# EAGLE board routed-norf (EAGLE 7.7.0)
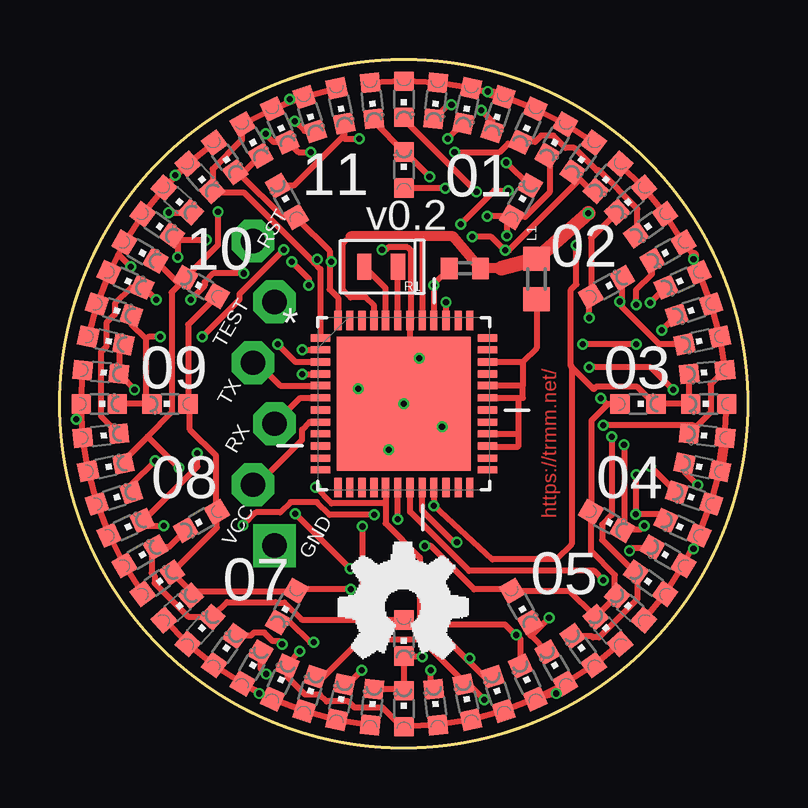
[diagram p0: board, top side]
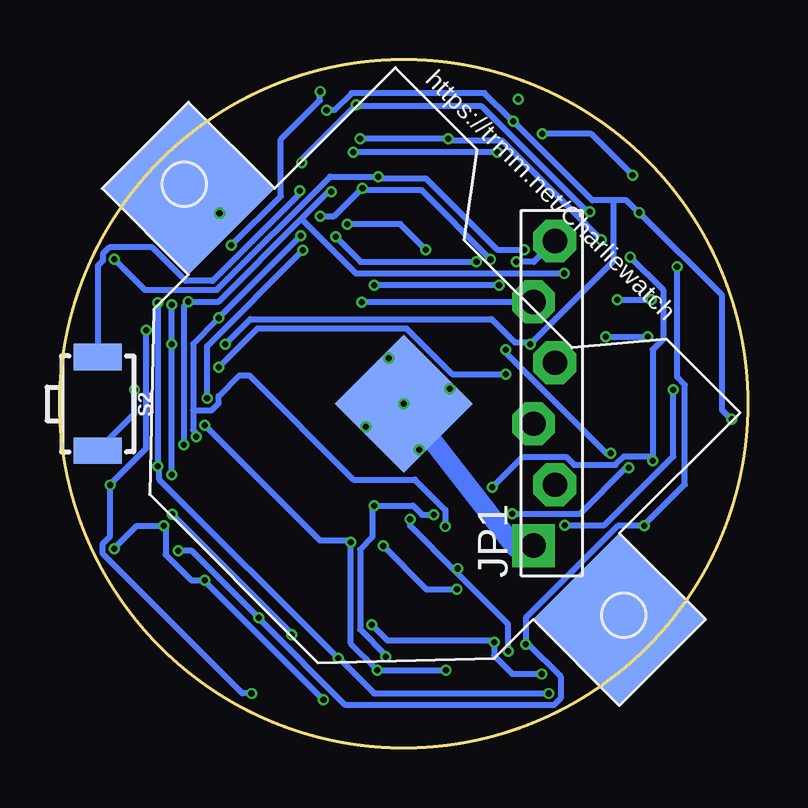
[diagram p1: board, bottom side, seen from below]

Size 28.66 x 28.66 mm. Coordinates in mm from the lower left corner, seen from the top.
Outline: circle at 14.33,14.33 radius 14.33
Copper layers (1*16): Top 0.035mm / dielectric 1.5mm / Bottom 0.035mm
Design rules "default *": minimum track width 10mil, minimum drill 10mil, track to track 5mil, track to pad 5mil, pad to pad 5mil, via to via 5mil, smd to smd 5mil, copper to edge 40mil, drill to drill 8mil, minimum pad ring 10mil, minimum via ring 4mil, stop-mask expansion 4mil, vias tented up to drill 15mil, thermal gap 10mil
Net classes: 0 default: width 0.102 mm, drill 0.025 mm, clearance 0.025 mm

## Footprints (pad centres in the part's own frame; a part is rotated, then mirrored left to right if it is on the bottom)
1X06-BIGLOCK = drill 1.016 pad 1.778 square: 1 -6.35,0.762 | drill 1.016 pad 1.778 octagon: 2 -3.81,-0.127; 3 -1.27,0.762; 4 1.27,-0.127; 5 3.81,0.762; 6 6.35,-0.127
R0603 = smd 1 x 1.1: 1 -0.85,0; 2 0.85,0
CHIPLED_0603 = smd 0.8 x 0.8: A 0,-0.75; C 0,0.75
R0402 = smd 0.7 x 0.9: 1 -0.65,0; 2 0.65,0
TACTILE_SWITCH_SMD_RIGHT_ANGLE = smd 1.1 x 2: 1 -1.95,0; 2 1.95,0
TP10SQ = smd 1 x 1: TP 0,0
TP10R = smd 1 x 1: TP 0,0
QFN50P700X700X100-49N = smd 0.813 x 0.305: 1 -3.48,2.743; 2 -3.48,2.261; 3 -3.48,1.753; 4 -3.48,1.245; 5 -3.48,0.762; 6 -3.48,0.254; 7 -3.48,-0.254; 8 -3.48,-0.762; 9 -3.48,-1.245; 10 -3.48,-1.753; 11 -3.48,-2.261; 12 -3.48,-2.743; 25 3.48,-2.743; 26 3.48,-2.261; 27 3.48,-1.753; 28 3.48,-1.245; 29 3.48,-0.762; 30 3.48,-0.254; 31 3.48,0.254; 32 3.48,0.762; 33 3.48,1.245; 34 3.48,1.753; 35 3.48,2.261; 36 3.48,2.743 | smd 0.305 x 0.813: 13 -2.743,-3.48; 14 -2.261,-3.48; 15 -1.753,-3.48; 16 -1.245,-3.48; 17 -0.762,-3.48; 18 -0.254,-3.48; 19 0.254,-3.48; 20 0.762,-3.48; 21 1.245,-3.48; 22 1.753,-3.48; 23 2.261,-3.48; 24 2.743,-3.48; 37 2.743,3.48; 38 2.261,3.48; 39 1.753,3.48; 40 1.245,3.48; 41 0.762,3.48; 42 0.254,3.48; 43 -0.254,3.48; 44 -0.762,3.48; 45 -1.245,3.48; 46 -1.753,3.48; 47 -2.261,3.48; 48 -2.743,3.48 | smd 5.588 x 5.588: 49 0,0
CR2032-SMD = smd 5.08 x 5.08: +$1 -12.7,0; +$2 12.7,0 | smd 4.064 x 4.064: - 0,0
2.0X1.2-2PAD = smd 0.6 x 1.1: 1 -0.7,0; 2 0.7,0

## Placement (x,y rotation side)
JP1  [1X06-BIGLOCK]  8.17,14.78 90 bottom
L1  [R0603]  19.86,19.54 90 top
LED0  [CHIPLED_0603]  13,26.96 186 top
LED1  [CHIPLED_0603]  14.33,27.03 180 top
LED2  [CHIPLED_0603]  15.66,26.96 174 top
LED3  [CHIPLED_0603]  16.97,26.75 168 top
LED4  [CHIPLED_0603]  18.25,26.41 162 top
LED5  [CHIPLED_0603]  19.5,25.93 156 top
LED6  [CHIPLED_0603]  20.68,25.33 150 top
LED7  [CHIPLED_0603]  21.8,24.6 144 top
LED8  [CHIPLED_0603]  26.96,15.66 96 top
LED9  [CHIPLED_0603]  26.75,16.97 102 top
LED10  [CHIPLED_0603]  26.41,18.25 108 top
LED11  [CHIPLED_0603]  25.93,19.5 114 top
LED12  [CHIPLED_0603]  25.33,20.68 120 top
LED13  [CHIPLED_0603]  24.6,21.8 126 top
LED14  [CHIPLED_0603]  23.77,22.83 132 top
LED15  [CHIPLED_0603]  22.83,23.77 138 top
LED16  [CHIPLED_0603]  27.03,14.33 90 top
LED17  [CHIPLED_0603]  26.96,13 84 top
LED18  [CHIPLED_0603]  26.75,11.69 78 top
LED19  [CHIPLED_0603]  26.41,10.41 72 top
LED20  [CHIPLED_0603]  25.93,9.16 66 top
LED21  [CHIPLED_0603]  25.33,7.98 60 top
LED22  [CHIPLED_0603]  24.6,6.87 54 top
LED23  [CHIPLED_0603]  23.77,5.83 48 top
LED24  [CHIPLED_0603]  14.33,1.63 0 top
LED25  [CHIPLED_0603]  15.66,1.7 6 top
LED26  [CHIPLED_0603]  16.97,1.91 12 top
LED27  [CHIPLED_0603]  18.25,2.25 18 top
LED28  [CHIPLED_0603]  19.5,2.73 24 top
LED29  [CHIPLED_0603]  20.68,3.33 30 top
LED30  [CHIPLED_0603]  21.8,4.06 36 top
LED31  [CHIPLED_0603]  22.83,4.89 42 top
LED32  [CHIPLED_0603]  13,1.7 354 top
LED33  [CHIPLED_0603]  11.69,1.91 348 top
LED34  [CHIPLED_0603]  10.41,2.25 342 top
LED35  [CHIPLED_0603]  9.16,2.73 336 top
LED36  [CHIPLED_0603]  7.98,3.33 330 top
LED37  [CHIPLED_0603]  6.87,4.06 324 top
LED38  [CHIPLED_0603]  5.83,4.89 318 top
LED39  [CHIPLED_0603]  4.89,5.83 312 top
LED40  [CHIPLED_0603]  1.7,15.66 264 top
LED41  [CHIPLED_0603]  1.63,14.33 270 top
LED42  [CHIPLED_0603]  1.7,13 276 top
LED43  [CHIPLED_0603]  1.91,11.69 282 top
LED44  [CHIPLED_0603]  2.25,10.41 288 top
LED45  [CHIPLED_0603]  2.73,9.16 294 top
LED46  [CHIPLED_0603]  3.33,7.98 300 top
LED47  [CHIPLED_0603]  4.06,6.87 306 top
LED48  [CHIPLED_0603]  1.91,16.97 258 top
LED49  [CHIPLED_0603]  2.25,18.25 252 top
LED50  [CHIPLED_0603]  2.73,19.5 246 top
LED51  [CHIPLED_0603]  3.33,20.68 240 top
LED52  [CHIPLED_0603]  4.06,21.8 234 top
LED53  [CHIPLED_0603]  4.89,22.83 228 top
LED54  [CHIPLED_0603]  5.83,23.77 222 top
LED55  [CHIPLED_0603]  6.87,24.6 216 top
LED56  [CHIPLED_0603]  14.33,4.58 180 top
LED57  [CHIPLED_0603]  14.33,24.08 0 top
LED58  [CHIPLED_0603]  22.77,19.2 300 top
LED59  [CHIPLED_0603]  19.2,22.77 330 top
LED60  [CHIPLED_0603]  11.69,26.75 192 top
LED61  [CHIPLED_0603]  10.41,26.41 198 top
LED62  [CHIPLED_0603]  9.16,25.93 204 top
LED63  [CHIPLED_0603]  7.98,25.33 210 top
LED64  [CHIPLED_0603]  24.08,14.33 270 top
LED65  [CHIPLED_0603]  4.58,14.33 90 top
LED66  [CHIPLED_0603]  22.77,9.46 240 top
LED67  [CHIPLED_0603]  5.89,19.2 60 top
LED68  [CHIPLED_0603]  9.46,22.77 30 top
LED69  [CHIPLED_0603]  9.46,5.89 150 top
LED70  [CHIPLED_0603]  19.2,5.89 210 top
LED71  [CHIPLED_0603]  5.89,9.46 120 top
R1  75k  [R0402]  16.87,19.98 0 top
S2  MOMENTARY-SWITCH-SPST-SMD-RIGHT-ANGLE  [TACTILE_SWITCH_SMD_RIGHT_ANGLE]  27.09,14.33 270 bottom
TP1  PTR1TP10SQ  [TP10SQ]  8.87,8.43 0 top
TP2  PTR1TP10R  [TP10R]  8.23,10.97 0 top
TP3  PTR1TP10R  [TP10R]  8.87,13.51 0 top
TP4  PTR1TP10R  [TP10R]  8.23,16.05 0 top
TP5  PTR1TP10R  [TP10R]  8.87,18.59 0 top
TP6  PTR1TP10R  [TP10R]  8.23,21.13 0 top
U2  CC430F5137IRGZR  [QFN50P700X700X100-49N]  14.33,14.33 0 top
U$1  [CR2032-SMD]  14.33,14.33 315 bottom
X1  CRYSTALS-NOGND-IQXC-25  [2.0X1.2-2PAD]  13.38,20.05 180 top

## Library data of the parts
JP1 U$1 = adafruit
L1 R1 = rcl
LED0 LED1-LED71 = led
S2 = SparkFun-Switches; PROD_ID: COMP-12265
TP1-TP6 = testpad
U2 = Texas Instruments_By_element14_Batch_1; MPN: CC430F5137IRGZR; OC_FARNELL: -; OC_NEWARK: 68R5912; PACKAGE: QFN-48; SUPPLIER: TEXAS INSTRUMENTS
X1 = IQD-Frequency-Products

## Nets
AVCC: L1.1 U2.27 U2.28 U2.31 U2.32 U2.34
B0: LED0.A LED1.A LED2.A LED3.A LED4.A LED5.A LED6.A LED7.A LED8.C LED16.C LED24.C LED32.C LED40.C LED48.C LED56.C LED64.C U2.21
B1: LED0.C LED8.A LED9.A LED10.A LED11.A LED12.A LED13.A LED14.A LED15.A LED17.C LED25.C LED33.C LED41.C LED49.C LED57.C LED65.C U2.20
B2: LED1.C LED9.C LED16.A LED17.A LED18.A LED19.A LED20.A LED21.A LED22.A LED23.A LED26.C LED34.C LED42.C LED50.C LED58.C LED66.C U2.19
B3: LED2.C LED10.C LED18.C LED24.A LED25.A LED26.A LED27.A LED28.A LED29.A LED30.A LED31.A LED35.C LED43.C LED51.C LED59.C LED67.C U2.18
B4: LED3.C LED11.C LED19.C LED27.C LED32.A LED33.A LED34.A LED35.A LED36.A LED37.A LED38.A LED39.A LED44.C LED52.C LED60.C LED68.C U2.17
B5: LED4.C LED12.C LED20.C LED28.C LED36.C LED40.A LED41.A LED42.A LED43.A LED44.A LED45.A LED46.A LED47.A LED53.C LED61.C LED69.C U2.3
B6: LED5.C LED13.C LED21.C LED29.C LED37.C LED45.C LED48.A LED49.A LED50.A LED51.A LED52.A LED53.A LED54.A LED55.A LED62.C LED70.C U2.2
B7: LED6.C LED14.C LED22.C LED30.C LED38.C LED46.C LED54.C LED56.A LED57.A LED58.A LED59.A LED60.A LED61.A LED62.A LED63.A LED71.C U2.1
B8: LED7.C LED15.C LED23.C LED31.C LED39.C LED47.C LED55.C LED63.C LED64.A LED65.A LED66.A LED67.A LED68.A LED69.A LED70.A LED71.A U2.48
BSL_RST: JP1.6 R1.1 TP6.TP U2.40
BSL_RX: JP1.3 TP3.TP U2.6
BSL_TEST: JP1.5 TP5.TP U2.39
BSL_TX: JP1.4 TP4.TP U2.5
BSL_VCC: JP1.2 TP2.TP U2.8
BUTTON: S2.2 U2.4
DVCC_3: U2.22
GND: JP1.1 S2.1 TP1.TP U2.42 U2.49 U$1.-
P2.4: U2.47
P2.7: U2.23
P3.5: U2.16
P3.6: U2.15
P3.7: U2.14
R_BIAS: U2.33
RF_N: U2.30
RF_P: U2.29
RF_XIN: U2.25
RF_XOUT: U2.26
VCC: L1.2 R1.2 U2.41 U2.45 U$1.+$1
VCORE: U2.7
XIN: U2.44 X1.2
XOUT: U2.43 X1.1

## Tracks (layer width: path | path; a pad name or v marks a point on that pad's centre or on a via)
AVCC
  Top 0.254: U2.27 17.84,12.55 19.09,12.55 19.09,13.09 | U2.28 19.09,13.09 | U2.34 19.28,16.08 | 19.28,16.08 19.28,15.09 | 19.28,15.09 U2.32 | 19.28,15.09 19.28,14.58 U2.31 19.09,14.58 19.09,13.09 | L1.1 19.85,16.65 19.28,16.08
B0  (via drill 0.25)
  Top 0.254: LED7.A LED6.A LED5.A LED4.A LED3.A LED2.A LED1.A LED0.A | LED32.C 14.23,2.44 LED24.C LED56.C 14.43,3.79 v15.09,3.79 | LED48.C 2.62,16.79 2.47,16.64 2.47,15.6 LED40.C 2.54,15.5 3.1,14.94 v3.1,14.91 | LED8.C 26.22,14.43 LED16.C LED64.C 24.72,14.38 24.06,15.04 22.33,15.04 22.24,14.95 21.29,15.91 | v7.62,9.28 8.16,9.81 9.17,9.81 9.61,10.24 10.7,10.24 11.23,9.71 v13.09,9.71 | v21.52,20.93 21.52,19.31 21.29,19.08 21.29,15.91 | U2.21 v15.58,10.09 15.59,10.09 18.01,7.85 20.68,7.85 21.32,8.49 21.32,15.91 21.29,15.91
  Top 0.406: v17.82,27.35 LED4.A
  Bottom 0.254: v3.1,14.91 3.1,12.15 5.97,9.28 v7.62,9.28 | v13.09,9.71 13.57,9.71 13.95,10.09 v15.58,10.09 15.65,9.99 15.65,8.77 16.16,8.26 16.16,4.93 15.09,3.87 v15.09,3.79 | v21.52,20.93 19.46,22.99 19.46,25.35 17.84,26.98 17.84,27.34 v17.82,27.35
B1  (via drill 0.25)
  Top 0.254: LED15.A LED14.A LED13.A LED12.A 26.42,20.54 LED11.A LED10.A LED9.A LED8.A 27.61,15.65 27.11,15.14 27.11,13.97 LED17.C 26.4,13.44 v22.64,13.44 | v12.58,3.23 11.99,2.65 11.87,2.65 LED33.C | v15.45,3.23 15.45,2.6 15.58,2.47 LED25.C | U2.20 15.09,9.89 16.41,8.56 v16.54,8.56 | LED41.C LED65.C 3.59,14.43 3.59,17.05 | 3.59,17.05 2.98,17.66 LED49.C | LED0.C 13.09,26.19 13.09,26.09 14.33,24.85 LED57.C 14.43,24.77 v15.4,23.8 | v4.17,17.12 3.69,17.12 3.59,17.05 | v5.92,17.12 7.47,18.67 7.47,18.9 v9.33,20.76
  Top 0.406: v26.4,20.36 26.42,20.54
  Bottom 0.254: v12.58,3.23 v15.45,3.23 15.52,3.33 16.54,4.35 v16.54,8.56 16.64,8.64 17.84,8.64 v22.64,13.44 | v26.4,20.36 v26.4,20.35 25.13,19.08 22.13,19.08 17.4,23.8 v15.4,23.8 15.3,23.73 13.42,23.73 10.44,20.76 v9.33,20.76 | v5.92,17.12 v4.17,17.12
B2  (via drill 0.25)
  Top 0.254: LED23.A LED22.A LED21.A LED20.A | LED20.A LED19.A LED18.A | LED17.A LED16.A | v26.4,8.3 LED20.A | LED34.C 11,2.98 12.53,4.5 15.07,4.5 16.79,2.77 16.79,2.65 LED26.C 16.92,2.57 17.12,2.57 v17.68,2.01 | v24.34,9.25 24.19,9.1 23.42,9.1 LED66.C 23.5,9.2 v23.5,12.63 | U2.19 14.58,9.83 17.05,7.37 22.26,7.37 v22.64,6.99 | LED42.C 1.71,13.82 1.71,16.49 1.94,16.72 1.94,17.71 2.29,18.06 2.29,18.52 2.95,19.18 LED50.C 3.54,19.16 v4.02,18.67 | 23.42,18.6 23.42,18.37 24.97,16.82 LED9.C | 23.42,18.6 23.42,19.56 LED58.C | LED1.C 14.33,26.19 v17.35,23.17 | v23.32,18.6 23.42,18.6 | v5.44,18.67 6.02,19.26 6.02,19.41 6.38,19.77 v7.65,19.77
  Top 0.406: LED17.A LED18.A
  Bottom 0.254: v26.4,8.3 v26.4,8.31 25.46,9.25 v24.34,9.25 24.26,9.15 24.26,8.06 23.2,6.99 v22.64,6.99 22.56,6.89 v17.68,2.01 | v17.35,23.17 17.48,23.17 18.61,22.04 | 18.61,22.04 22.05,18.6 v23.32,18.6 23.4,18.5 23.5,18.39 v23.5,12.63 | v5.44,18.67 v4.02,18.67 | v7.65,19.77 16.34,19.77 18.61,22.04
B3  (via drill 0.25)
  Top 0.254: LED28.A LED27.A LED26.A LED25.A LED24.A 14.2,0.92 13.44,1.68 12.27,1.68 12.02,1.94 11.1,1.94 10.83,2.21 10.22,2.21 9.48,2.95 LED35.C 9.5,3.54 v9.99,4.02 | LED31.A LED30.A LED29.A LED28.A | v20.68,2.27 LED28.A | v18.6,24.39 19.56,23.42 LED59.C | v16.31,26.8 16.18,26.8 15.6,26.22 LED2.C | 3.65,12.97 4.65,13.97 4.65,18.98 5.24,19.56 LED67.C | 3.65,12.97 2.65,11.97 2.65,11.87 LED43.C | LED51.C 3.99,20.3 4.91,19.39 LED67.C | v6.58,22.33 6.58,20.96 5.31,19.69 LED67.C | v26.57,10.95 26.04,11.49 26.04,11.84 LED18.C | v25.07,17.4 LED10.C | v14.08,9.53 U2.18 | v4.96,11.66 3.65,12.97 | v12.1,7.47 v9.81,9.76
  Bottom 0.254: v18.6,24.39 18.6,24.52 v16.31,26.8 16.21,26.73 11.08,26.73 6.69,22.33 v6.58,22.33 | v20.68,2.27 21.06,2.27 26.88,8.08 26.88,8.51 26.57,8.82 v26.57,10.95 26.5,11.05 25.07,12.48 v25.07,17.4 | v14.08,9.53 14.08,9.25 12.21,7.38 | 12.21,7.38 9.99,5.16 v9.99,4.02 | v4.96,11.66 5.08,11.66 6.99,9.76 v9.81,9.76 | v12.1,7.47 12.12,7.47 12.21,7.38
B4  (via drill 0.25)
  Top 0.254: LED36.A LED37.A LED38.A LED39.A | LED36.A LED35.A LED34.A LED33.A LED32.A | LED36.A v8.3,2.27 | 11.78,25.47 11.84,25.53 LED60.C | 11.78,25.47 9.73,23.42 9.1,23.42 LED68.C | v16.16,25.38 16.79,26.01 LED3.C | v12.48,25.38 11.87,25.38 11.78,25.47 | v3.97,11.97 2.98,10.98 LED44.C | v4.91,20.45 4.91,21.11 4.68,21.34 LED52.C 5.01,21.16 v6.1,21.16 | v24.59,11.74 LED19.C | v24.59,18.55 25.23,19.18 LED11.C | 16.98,3.65 15.98,4.65 15.47,4.65 14.99,5.14 14.99,7.93 13.57,9.35 13.57,10.19 | 16.98,3.65 17.66,2.98 LED27.C | U2.17 13.57,10.19 | v17.07,3.74 16.98,3.65 | v10.65,10.85 11.31,10.19 13.57,10.19
  Bottom 0.254: v16.16,25.38 v12.48,25.38 12.37,25.3 10.24,25.3 v6.1,21.16 | v4.91,20.45 3.54,19.08 3.54,17.02 3.97,16.59 v3.97,11.97 4.07,12.15 5.16,12.15 5.52,11.79 7.24,11.79 7.57,12.12 9.38,12.12 v10.65,10.85 | v24.59,18.55 v24.59,11.74 24.52,11.64 24.52,11.18 v17.07,3.74 16.97,3.66 15.58,2.27 v8.3,2.27
B5  (via drill 0.25)
  Top 0.254: LED41.A LED42.A LED43.A LED44.A LED45.A LED46.A LED47.A | LED41.A LED40.A | LED41.A v0.68,13.7 | v4.53,22.31 5.44,22.31 LED53.C | v9.78,26.12 10.19,25.71 10.62,25.71 LED61.C | v17.56,26.57 18.01,26.12 18.01,25.71 LED4.C | U2.3 9.81,16.08 v9.07,16.82 | v8.59,3.08 8.36,3.31 8.36,3.97 LED36.C | v10.57,4.4 10.42,4.4 9.58,5.24 9.1,5.24 LED69.C | LED28.C 19.18,3.43 19.18,4.53 v19,4.7 18.9,4.78 18.55,5.14 v15.68,5.14 | LED20.C 25.23,9.48 24.97,9.73 v23.98,9.73 24.01,9.83 v24.01,11.38 | v24.01,18.47 24.01,19.08 24.67,19.74 24.67,20.3 LED12.C | v24.01,16.82 v21.77,16.82
  Bottom 0.254: v0.68,13.7 v0.69,13.7 1.07,14.08 1.07,18.85 v4.53,22.31 4.63,22.38 5.06,22.81 5.62,22.81 | 5.62,22.81 6.48,22.81 v9.78,26.12 9.89,26.19 10.98,27.28 16.51,27.28 17.23,26.57 v17.56,26.57 | 5.62,22.81 5.62,20.27 v9.07,16.82 9.17,16.9 9.71,16.9 10.67,17.86 20.73,17.86 v21.77,16.82 | v8.59,3.08 9.81,3.08 10.57,3.84 v10.57,4.4 10.67,4.48 15.02,4.48 v15.68,5.14 | v19,4.7 19,4.75 v23.98,9.73 | v24.01,11.38 v24.01,16.82 v24.01,18.47
B6  (via drill 0.25)
  Top 0.254: LED55.A LED54.A | LED54.A LED53.A LED52.A LED51.A 2.41,20.53 | 2.41,20.53 LED50.A LED49.A LED48.A | LED54.A v4.81,23.86 | 19.63,4.67 20.3,3.99 LED29.C | 19.63,4.67 19.59,4.7 LED70.C | v23.73,8.21 23.86,8.34 24.67,8.34 LED21.C | 19.63,4.67 v20.38,5.42 | LED13.C 24.01,21.37 24.06,21.42 24.06,22.46 22.46,24.06 22.36,24.06 21.42,25 21.06,25 20.55,25.51 20.05,25.51 19.79,25.25 19.21,25.25 LED5.C 19.08,25.18 18.67,25.18 18.32,24.82 v16.44,24.82 | v8.56,25.58 8.89,25.25 9.45,25.25 LED62.C 9.58,25.18 9.94,24.82 v10.44,24.82 | v9.25,4.32 9.12,4.45 8.87,4.45 8.51,4.81 8.08,4.81 7.96,4.68 7.32,4.68 LED37.C | v4.32,9.25 3.64,9.25 3.43,9.45 LED45.C 3.54,9.53 5.72,11.71 v5.72,12.27 | v10.09,16.59 U2.2 | v2.95,20.05 2.52,20.48 2.41,20.53
  Bottom 0.254: v23.73,8.21 23.17,8.21 v20.38,5.42 20.3,5.31 16.77,1.78 8.08,1.78 7.8,2.06 7.8,2.98 9.15,4.32 v9.25,4.32 9.25,5.42 5.42,9.25 v4.32,9.25 4.25,9.35 2.62,10.98 2.62,15.12 2.95,15.45 v2.95,20.05 | v8.56,25.58 6.53,25.58 v4.81,23.86 | v10.09,16.59 10.09,16.46 5.9,12.27 v5.72,12.27 | v10.44,24.82 v16.44,24.82
B7  (via drill 0.25)
  Top 0.254: LED61.A LED60.A | LED61.A LED62.A LED63.A 7.57,25.86 7.57,25.33 6.35,24.11 6.35,23.22 LED54.C 6.46,23.14 7.65,23.14 10.58,20.21 | LED61.A v9.57,27.03 | LED71.C 4.53,8.36 3.99,8.36 LED46.C 3.89,8.26 3.81,8.18 3.81,7.29 3.94,7.17 3.94,6.86 5.34,5.47 6.33,5.47 LED38.C 6.43,5.54 6.96,6.08 8.97,6.08 9,6.05 9.35,6.05 10.06,5.34 12.6,5.34 | 12.6,5.34 LED56.A | U2.1 10.85,19.94 10.58,20.21 | LED30.C 21.37,4.65 22.15,4.65 22.2,4.6 22.46,4.6 24.06,6.2 24.06,7.24 24.01,7.29 LED22.C 23.88,7.37 22.59,8.67 22.59,9.3 22.99,9.71 v22.99,12.96 | LED14.C 23.2,22.31 22.13,21.24 22.13,18.85 LED58.A 22.05,18.72 v22.05,17.91 | LED59.A 18.85,22.13 19.39,22.13 20.4,23.14 20.4,24.59 20.32,24.67 LED6.C | v16.06,23.32 LED57.A | v17.81,22.15 18.7,22.15 LED59.A | v18.62,21.34 18.62,22.05 LED59.A | v10.72,20.35 10.58,20.21 | v12.6,9.23 12.6,5.34
  Bottom 0.254: v17.81,22.15 17.23,22.15 v16.06,23.32 15.96,23.25 13.62,23.25 v10.72,20.35 | v18.62,21.34 v22.05,17.91 22.13,17.81 23.12,16.82 23.12,14.08 | v22.99,12.96 22.99,13.11 23.12,13.24 23.12,14.08 | v12.6,9.23 12.6,9.91 13.87,11.18 16.44,11.18 20.78,15.52 21.19,15.52 22.05,14.66 22.05,14.36 22.33,14.08 23.12,14.08
B8  (via drill 0.25)
  Top 0.254: LED67.A 5.34,17.63 LED65.A 5.42,14.23 5.42,13.26 6.51,12.17 6.51,9.96 LED71.A 6.53,9.81 6.53,9.17 4.75,7.4 LED47.C 4.68,7.29 5.44,6.53 5.44,6.35 LED39.C 5.54,6.53 9.81,6.53 LED69.A 9.94,6.61 v12.12,6.61 | LED63.C 8.34,24.67 7.68,24.01 LED55.C 7.5,23.91 9.28,22.13 9.81,22.13 LED68.A 9.91,22.03 11.23,20.71 11.23,20.25 | U2.48 11.59,18.75 11.23,19.11 11.23,20.25 | 21.66,23.69 21.37,23.98 LED7.C | 21.66,23.69 22.13,23.22 22.31,23.22 LED15.C | LED64.A 22.84,14.33 22.8,14.29 | 22.8,14.29 22.15,13.64 22.15,9.96 LED66.A 22.13,9.81 22.13,8.18 23.12,7.19 23.12,6.43 LED23.C 23.2,6.33 22.33,5.47 LED31.C 22.23,5.54 21.24,6.53 18.85,6.53 LED70.A 18.72,6.61 17.25,6.61 15.45,8.41 v15.19,8.41 | 21.66,23.69 18.7,20.73 v18.55,20.73 18.45,20.81 17.96,21.29 v17.18,21.29 | 22.8,14.29 v22.53,14.56 | v11.31,20.25 11.23,20.25
  Bottom 0.254: v18.55,20.73 22.53,16.74 v22.53,14.56 | v11.31,20.25 16.13,20.25 v17.18,21.29 | v12.12,6.61 13.39,6.61 v15.19,8.41
BSL_RST  (via drill 0.25)
  Top 0.254: U2.40 v15.58,19.28 15.58,19.33 R1.1 | TP6.TP 8.23,21.14 8.06,21.14 JP1.6 | v10.37,19.28 10.37,19.54 v9.66,20.25
  Bottom 0.254: v10.37,19.28 v15.58,19.28 | v9.66,20.25 8.92,20.25 JP1.6
BSL_RX
  Top 0.254: U2.6 10.01,14.58 JP1.3 8.82,13.52 8.23,13.52 TP3.TP
BSL_TEST  (via drill 0.25)
  Top 0.254: v16.08,18.57 U2.39 | TP5.TP 8.23,18.6 8.92,18.6 JP1.5
  Bottom 0.254: v16.08,18.57 8.95,18.57 JP1.5
BSL_TX
  Top 0.254: U2.5 9.17,15.09 TP4.TP 8.13,16.03 8.06,16.03 JP1.4
BSL_VCC
  Top 0.254: U2.8 10.39,13.57 10.09,13.26 10.09,12.83 8.23,10.98 TP2.TP 8.13,10.98 8.06,10.98 JP1.2
BUTTON  (via drill 0.25)
  Top 0.254: v10.09,15.58 U2.4 | v22.05,15.85 24.62,15.85 v25.56,14.91
  Bottom 0.254: v10.09,15.58 12.32,15.58 14.23,17.48 20.43,17.48 v22.05,15.85 | v25.56,14.91 25.56,13.92 27.08,12.4 S2.2
GND  (via drill 0.25)
  Top 0.254: 14.58,16.3 U$1.- | v12.43,14.97 U$1.- | v13.7,12.43 U$1.- | v14.97,16.24 U$1.- | v15.92,13.38 U$1.- | U$1.- 14.58,16.41 U2.42 14.64,17.91 14.64,20.71 14.48,20.86 13.67,20.86 13.57,20.76 v13.42,20.76 | v18.67,23.22 18.09,23.22 v16.69,21.82
  Top 0.61: U$1.- 12.43,12.43 12.43,12.11
  Bottom 0.254: TP1.TP 8.95,8.41 JP1.1 | v18.67,23.22 18.67,23.09 22.31,19.46 23.42,19.46 24.82,20.86 26.6,20.86 26.88,20.58 26.88,20.3 27.08,20.1 S2.1 | v16.69,21.82 14.48,21.82 v13.42,20.76
  Bottom 0.813: TP1.TP 9.7,8.36 U$1.-
  other vias: 14.33,14.33 8.87,8.43
VCC  (via drill 0.25)
  Top 0.254: U2.45 13.09,18.43 12.74,18.78 12.11,18.78 11.79,19.09 11.79,21 12.11,21.32 | 15.09,21.32 U2.41
  Top 0.406: L1.2 19.83,20.36 | 18.39,19.98 R1.2 16.39,21.32 15.09,21.32 12.11,21.32
  Top 0.61: 18.39,19.98 L1.2 v22.01,22.27
  Bottom 0.254: v22.01,22.27 22.03,22.28 22.28,22.28 23.3,23.3 U$1.+$1
XIN
  Top 0.254: U2.44 13.57,19.15 X1.2
XOUT
  Top 0.254: U2.43 X1.1

## Text on the board
Top: https://trmm.net/
tNames: RST | 11 | 01 | v0.2 | 10 | 02 | TEST | 09 | 03 | TX | RX | 08 | GND | 04 | VCC | 07 | 05
bNames: https://trmm.net/Charliewatch
tStop: https://trmm.net/
Document: Don't forget change dimension circle to 0.5642